# EAGLE board t10 arduino prog (EAGLE 6.1)
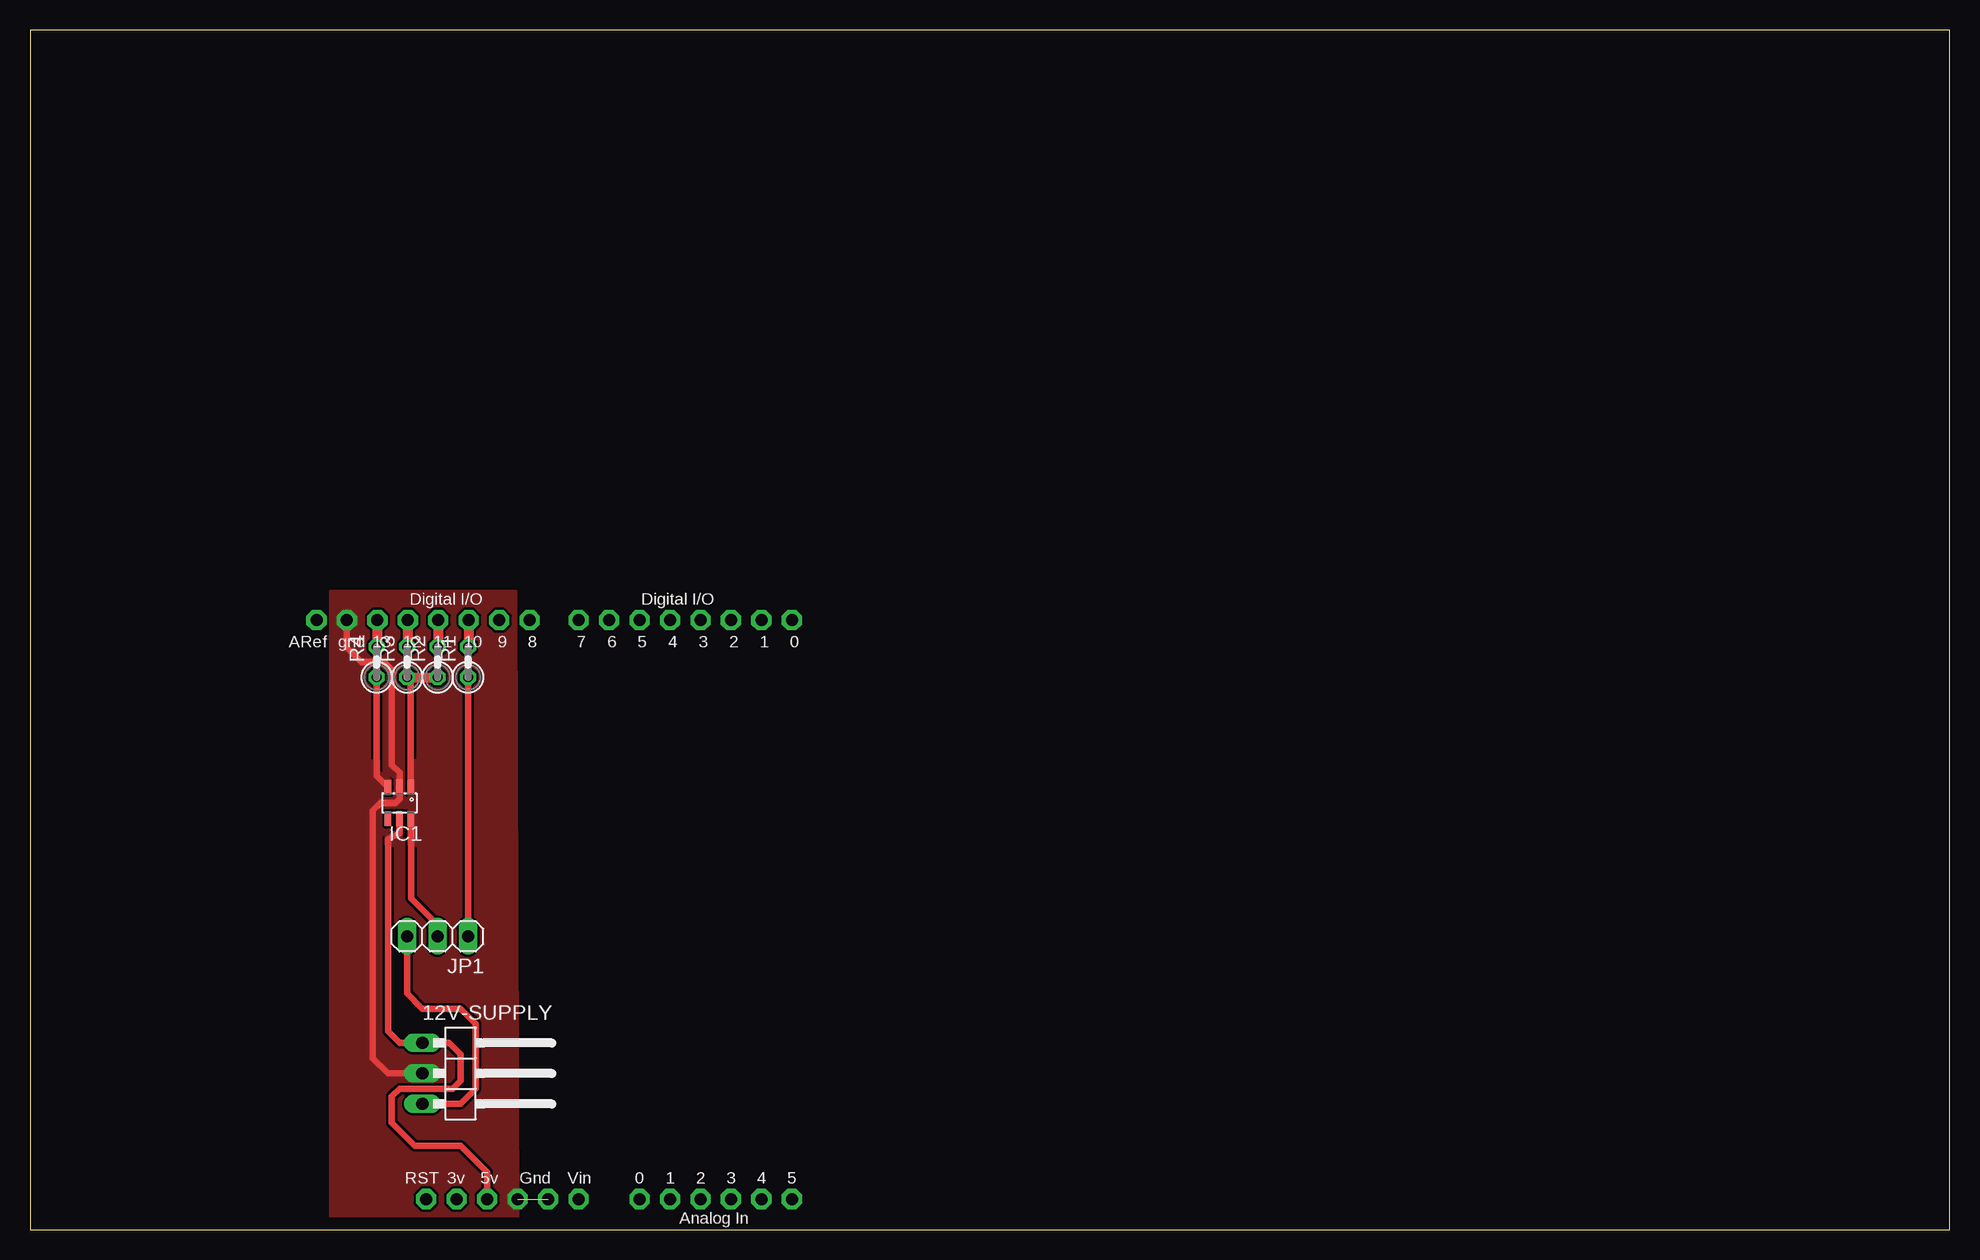
[diagram p0: board, top side]
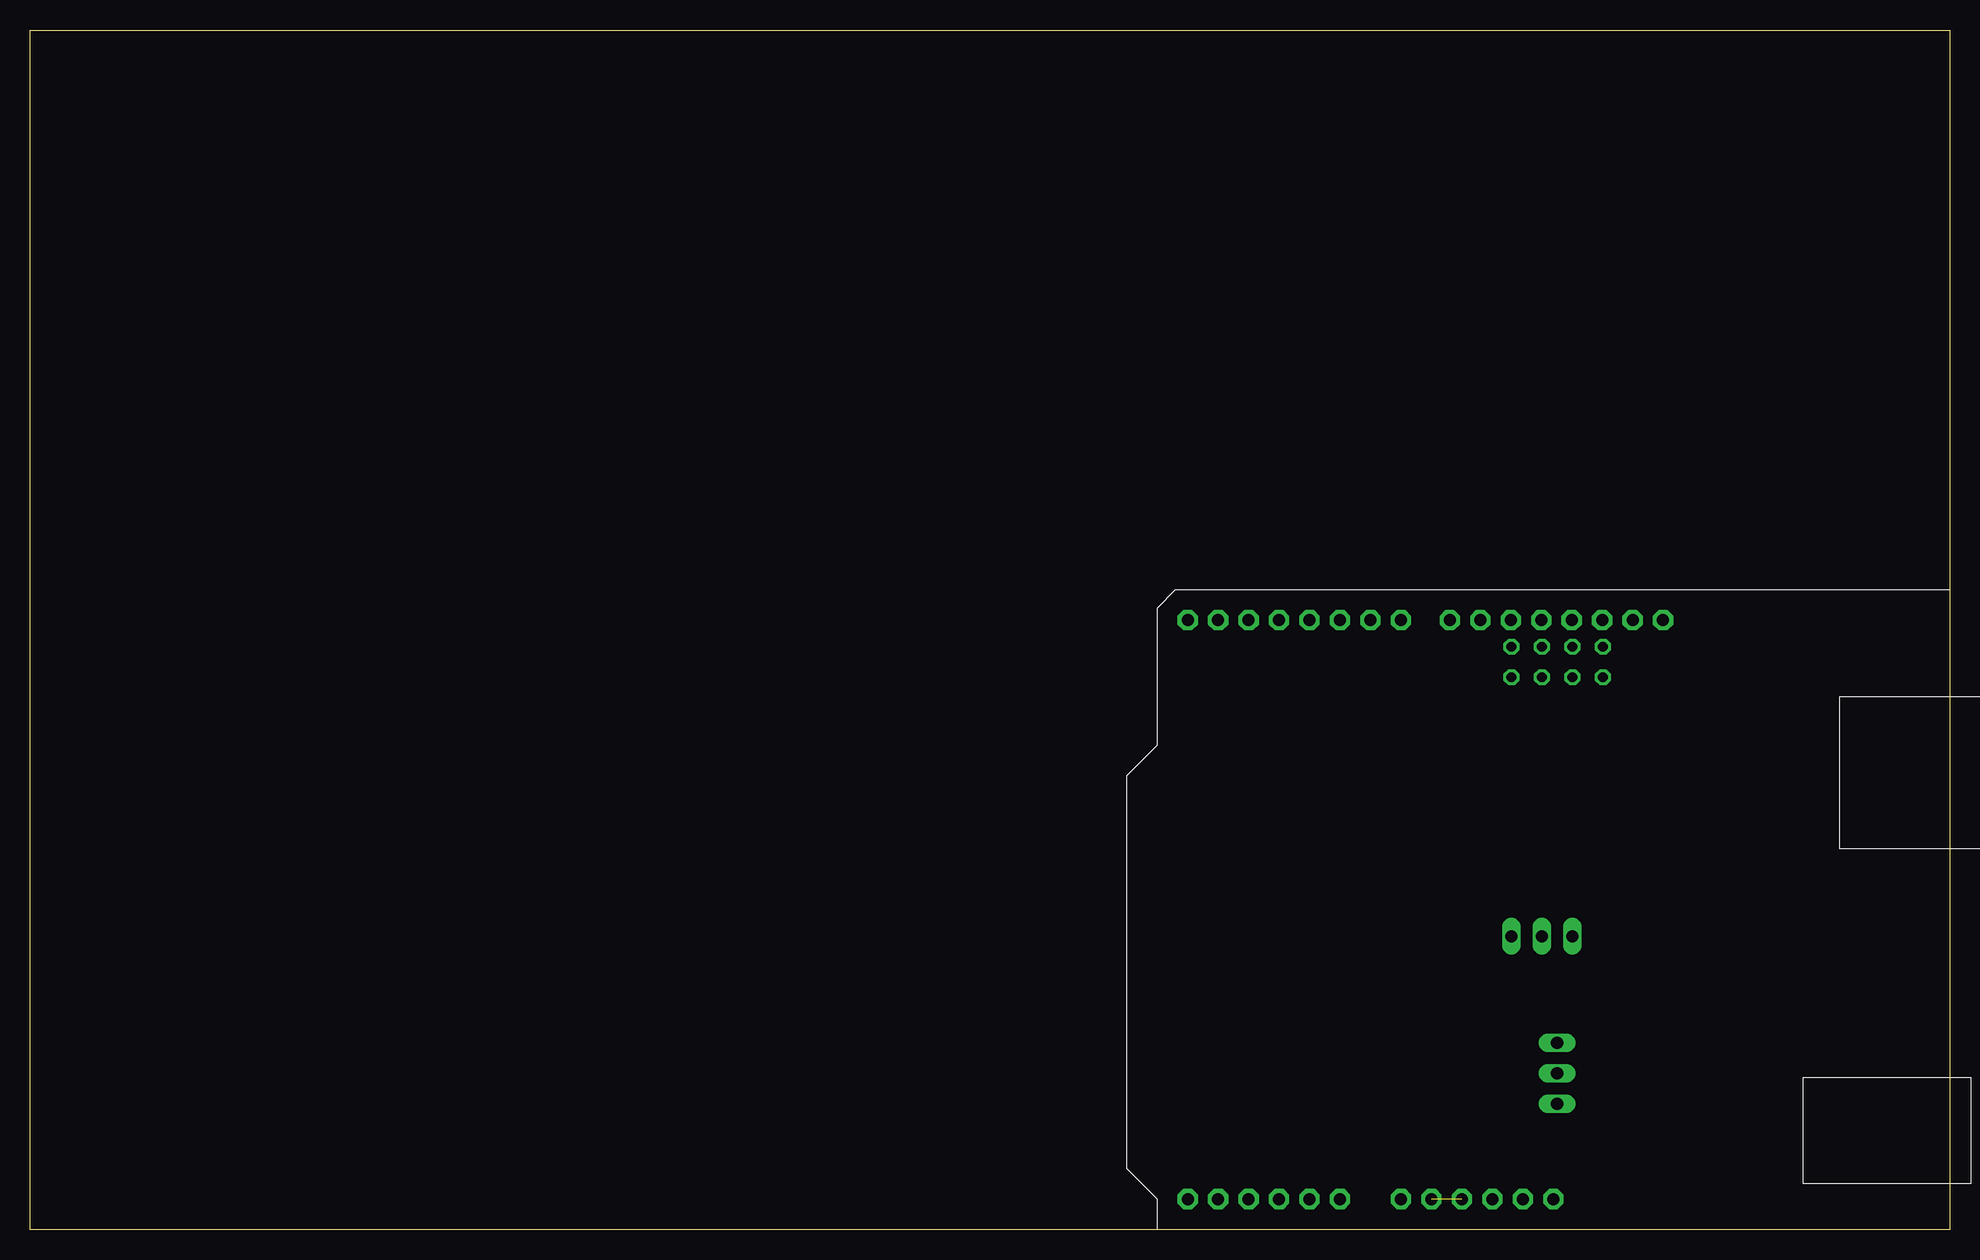
[diagram p1: board, bottom side, seen from below]

Size 160 x 100 mm. Coordinates in mm from the lower left corner, seen from the top.
Outline: 0,0 160,0 160,100 0,100 0,0
Copper layers (1*16): Top 0.035mm / dielectric 1.5mm / Bottom 0.035mm
Design rules: minimum track width 10mil, minimum drill 24mil, track to track 8mil, track to pad 8mil, pad to pad 8mil, via to via 8mil, smd to smd 8mil, copper to edge 40mil, drill to drill 8mil, minimum pad ring 10mil, minimum via ring 8mil, stop-mask expansion 4mil, vias tented up to drill 0mil, thermal gap 10mil

## Footprints (pad centres in the part's own frame; a part is rotated, then mirrored left to right if it is on the bottom)
1X03/90 = drill 1.016 long: 1 -2.54,-3.81; 2 0,-3.81; 3 2.54,-3.81
SOT23-6 = smd 0.55 x 1.2: 1 -0.95,-1.3; 2 0,-1.3; 3 0.95,-1.3; 4 0.95,1.3; 5 0,1.3; 6 -0.95,1.3
1X03 = drill 1.016 long: 1 -2.54,0; 2 0,0; 3 2.54,0
0207/2V = drill 0.813 octagon: 1 -1.27,0; 2 1.27,0
ARDUINO-NOHOLE = drill 1 pad 1.676 octagon: 3V 35.56,2.54; 5V 38.1,2.54; A0 50.8,2.54; A1 53.34,2.54; A2 55.88,2.54; A3 58.42,2.54; A4 60.96,2.54; A5 63.5,2.54; AREF 23.876,50.8; D0 63.5,50.8; D1 60.96,50.8; D2 58.42,50.8; D3 55.88,50.8; D4 53.34,50.8; D5 50.8,50.8; D6 48.26,50.8; D7 45.72,50.8; D8 41.656,50.8; D9 39.116,50.8; D10 36.576,50.8; D11 34.036,50.8; D12 31.496,50.8; D13 28.956,50.8; GND 26.416,50.8; GND1 43.18,2.54; GND2 40.64,2.54; RESET 33.02,2.54; VIN 45.72,2.54

## Placement (x,y rotation side)
12V-SUPPLY  [1X03/90]  36.51,13.02 270 top
IC1  ATTINY10  [SOT23-6]  30.8,35.56 180 top
JP1  [1X03]  33.97,24.45 180 top
R1  2k2  [0207/2V]  36.51,47.31 90 top
R2  2k2  [0207/2V]  33.97,47.31 90 top
R3  2k2  [0207/2V]  31.43,47.31 90 top
R4  2k2  [0207/2V]  28.89,47.31 90 top
U$1  ARDUINO-NOHOLE  [ARDUINO-NOHOLE]  0,0 0 top

## Library data of the parts
12V-SUPPLY JP1 = pinhead
IC1 U$1 = adafruit
R1-R4 = rcl

## Nets
3V: U$1.3V
+5V: 12V-SUPPLY.1 IC1.5 U$1.5V
+12V: 12V-SUPPLY.3 JP1.3
GND: 12V-SUPPLY.2 IC1.2 U$1.GND U$1.GND1 U$1.GND2
N$5: R1.2 U$1.D10
N$6: R2.2 U$1.D11
N$7: R3.2 U$1.D12
N$8: R4.2 U$1.D13
N$9: IC1.1 R2.1 R3.1
N$10: IC1.3 R4.1
N$11: JP1.1 R1.1
N$12: IC1.6 JP1.2
VIN: U$1.VIN

## Tracks (layer width: path | path; a pad name or v marks a point on that pad's centre or on a via)
+5V
  Top 0.559: IC1.5 30.8,33.02 29.84,32.54 29.84,16.51 30.8,15.56 12V-SUPPLY.1 34.92,15.56 35.88,14.61 35.88,12.38 35.24,11.75 30.8,11.75 30.16,11.11 30.16,8.89 32.07,6.99 35.88,6.99 38.1,4.76 U$1.5V
  pour Top (no thermals): 30.64,34.77 30.96,34.77 30.96,32.07 29.69,32.07 29.69,32.86 30.64,33.18
+12V
  Top 0.559: JP1.3 31.43,19.68 32.7,18.41 35.88,18.41 37.15,17.14 37.15,11.75 35.88,10.48 12V-SUPPLY.3
GND  (1 unrouted)
  Top 0.559: IC1.2 30.8,38.1 30.16,38.73 30.16,46.67 29.53,47.31 27.62,47.31 26.42,48.51 U$1.GND | 12V-SUPPLY.2 29.84,13.02 28.57,14.29 28.57,34.92 29.21,35.56 30.48,35.56 30.8,35.88 30.8,36.83
  pour Top (no thermals): 30.64,36.51 30.64,37.78 29.69,38.42 29.69,39.05 30.96,39.05 30.96,36.51
  pour Top (no thermals): 25.08,53.18 40.48,53.18 40.64,0 25.08,0
N$5
  Top 0.813: U$1.D10 36.58,48.64 R1.2
N$6
  Top 0.813: U$1.D11 34.04,48.64 R2.2
N$7
  Top 0.813: U$1.D12 31.5,48.64 R3.2
N$8
  Top 0.813: U$1.D13 28.96,48.64 R4.2
N$9
  Top 0.559: IC1.1 31.75,45.56 R3.1
  Top 0.813: R3.1 R2.1
  pour Top (no thermals): 31.59,35.88 33.34,35.88 33.34,38.1 32.38,39.05 31.59,39.05
N$10
  Top 0.559: R4.1 28.89,37.81 IC1.3
  pour Top (no thermals): 29.05,39.05 29.05,38.1 30,37.47 30,36.35 29.05,36.35 28.26,37.15 28.26,38.73 28.57,39.05
N$11
  Top 0.559: JP1.1 R1.1
N$12
  Top 0.559: JP1.2 33.97,25.4 31.75,27.62 31.75,33.62 IC1.6
  pour Top (no thermals): 31.59,35.24 31.59,32.07 32.38,32.07 33.34,33.02 33.34,35.24